# EAGLE board Redesign-8Ch-Mux-Breakout-PMODIA (EAGLE 9.6.2)
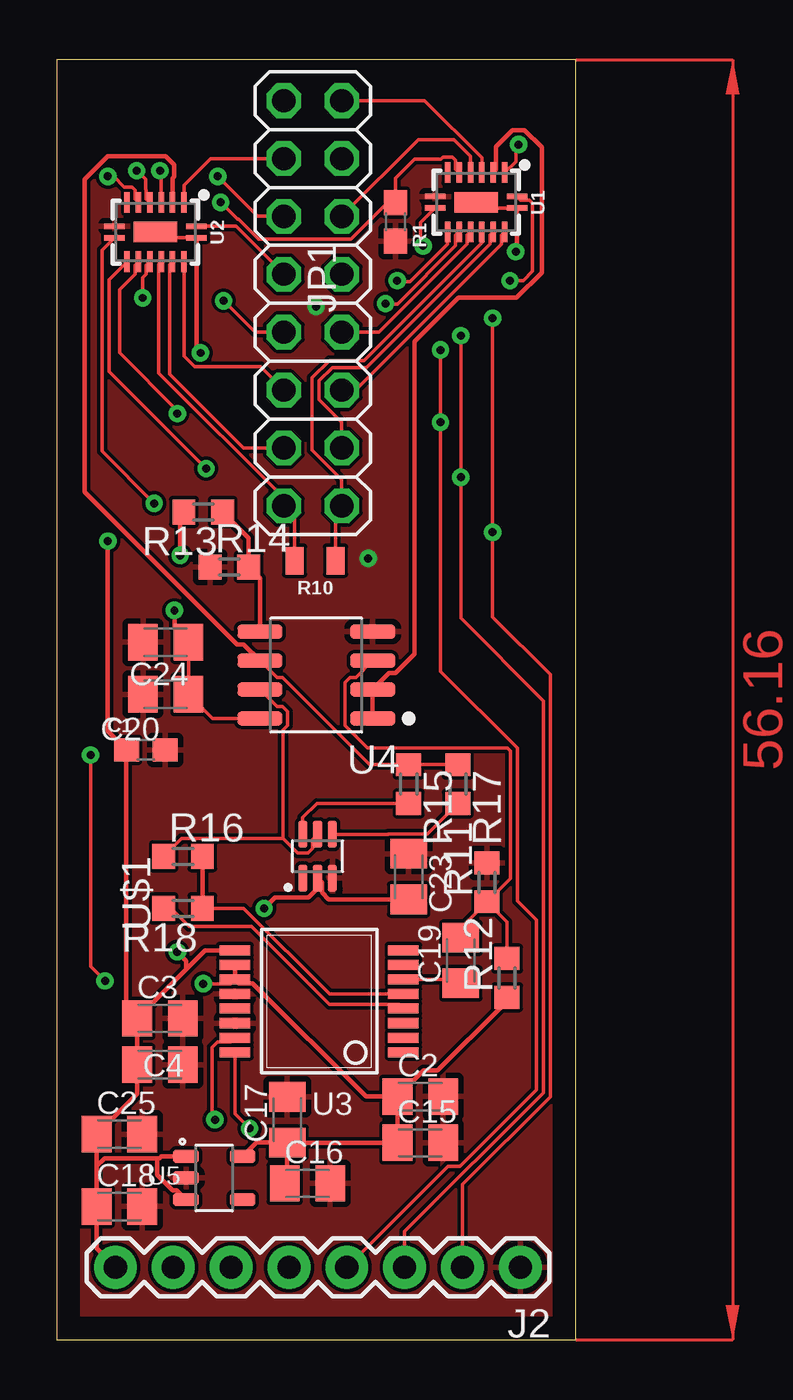
[diagram p0: board, top side]
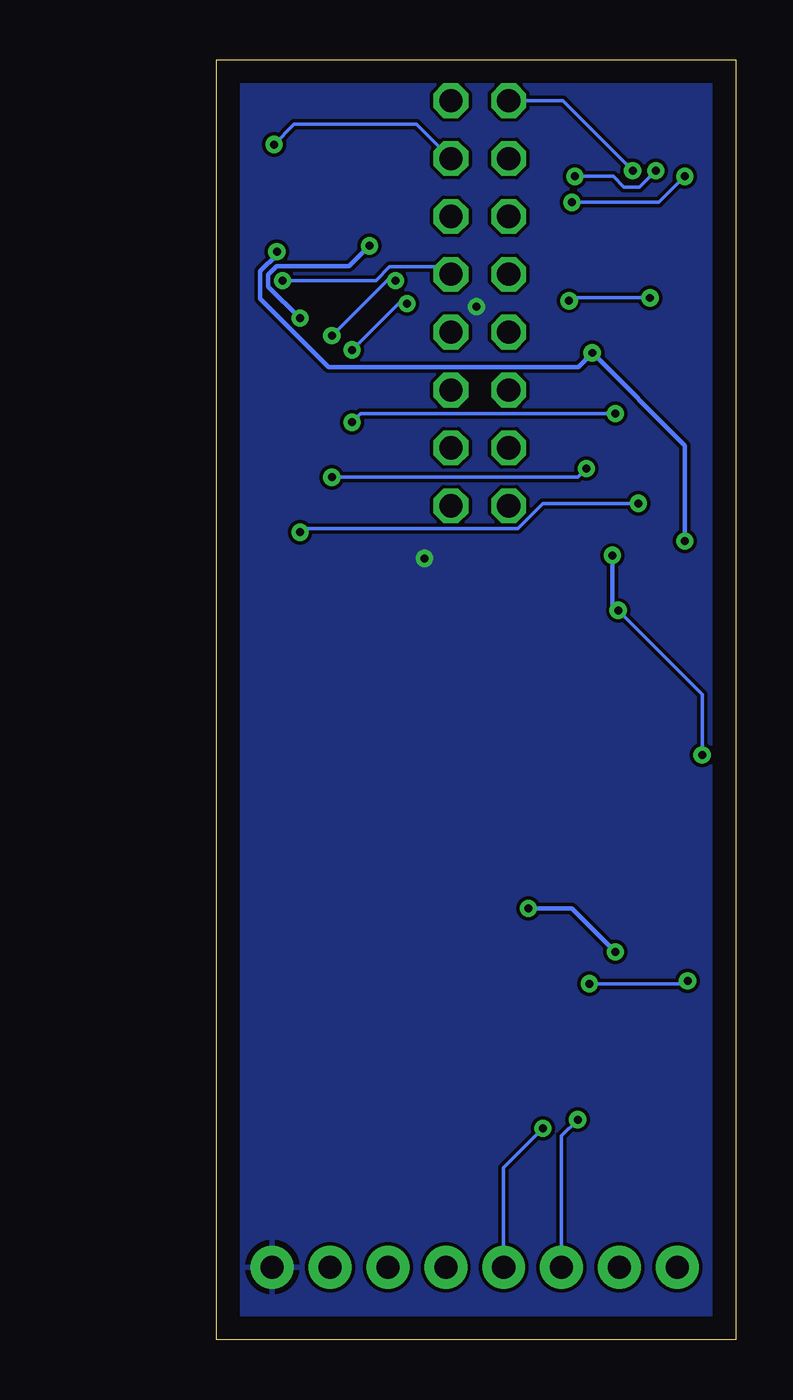
[diagram p1: board, bottom side, seen from below]

Size 22.79 x 56.16 mm. Coordinates in mm from the lower left corner, seen from the top.
Outline: 0,0 22.79,0 22.79,56.16 0,56.16 0,0
Copper layers (1*16): Top 0.035mm / dielectric 1.5mm / Bottom 0.035mm
Design rules "default": minimum track width 6mil, minimum drill 0.35mm, track to track 6mil, track to pad 6mil, pad to pad 6mil, via to via 6mil, smd to smd 6mil, copper to edge 40mil, drill to drill 6mil, minimum pad ring 10mil, minimum via ring 8mil, stop-mask expansion 4mil, vias tented up to drill 0mil, thermal gap 10mil

## Footprints (pad centres in the part's own frame; a part is rotated, then mirrored left to right if it is on the bottom)
0603 = smd 1.1 x 1: 1 -0.85,0; 2 0.85,0
C0805K = smd 1.3 x 1.6: 1 -1,0; 2 1,0
1X08_ROUND = drill 1.016 pad 1.88: 1 0,0; 2 2.54,0; 3 5.08,0; 4 7.62,0; 5 10.16,0; 6 12.7,0; 7 15.24,0; 8 17.78,0
2X08 = drill 1.016 octagon: 1 -8.89,-1.27; 2 -8.89,1.27; 3 -6.35,-1.27; 4 -6.35,1.27; 5 -3.81,-1.27; 6 -3.81,1.27; 7 -1.27,-1.27; 8 -1.27,1.27; 9 1.27,-1.27; 10 1.27,1.27; 11 3.81,-1.27; 12 3.81,1.27; 13 6.35,-1.27; 14 6.35,1.27; 15 8.89,-1.27; 16 8.89,1.27
0805 = smd 0.8 x 1.2: 1 -0.9,0; 2 0.9,0
R0603 = smd 1 x 1.1: 1 -0.85,0; 2 0.85,0
DHVQFN-16-2.5X3.5MM = smd 0.9 x 0.24: 1 -1.8,-0.25; 8 1.8,-0.25; 9 1.8,0.25; 16 -1.8,0.25 | smd 0.24 x 0.9: 2 -1.25,-1.3; 3 -0.75,-1.3; 4 -0.25,-1.3; 5 0.25,-1.3; 6 0.75,-1.3; 7 1.25,-1.3; 10 1.25,1.3; 11 0.75,1.3; 12 0.25,1.3; 13 -0.25,1.3; 14 -0.75,1.3; 15 -1.25,1.3 | smd 1.9 x 0.9: EP 0,0
SSOP16 = smd 0.44 x 1.34: 1 -2.24,-3.7; 2 -1.6,-3.7; 3 -0.96,-3.7; 4 -0.32,-3.7; 5 0.32,-3.7; 6 0.96,-3.7; 7 1.6,-3.7; 8 2.24,-3.7; 9 2.24,3.7; 10 1.6,3.7; 11 0.96,3.7; 12 0.32,3.7; 13 -0.32,3.7; 14 -0.96,3.7; 15 -1.6,3.7; 16 -2.24,3.7
SOIC-8 = smd 1.97 x 0.6: 1 -2.475,1.905; 2 -2.475,0.635; 3 -2.475,-0.635; 4 -2.475,-1.905; 5 2.475,-1.905; 6 2.475,-0.635; 7 2.475,0.635; 8 2.475,1.905
SOT95P280X100-5N = smd 1.14 x 0.59: 1 -1.245,0.95; 2 -1.245,0; 3 -1.245,-0.95; 4 1.245,-0.95; 5 1.245,0.95
SOT65P210X110-6N = smd 1.19 x 0.4: 1 -0.96,0.65; 2 -0.96,0; 3 -0.96,-0.65; 4 0.96,-0.65; 5 0.96,0; 6 0.96,0.65

## Placement (x,y rotation side)
C1  0.1uF  [0603]  3.91,25.88 0 top
C2  0.1uF  [C0805K]  15.95,10.67 0 top
C3  10uF  [C0805K]  4.52,14.1 0 top
C4  0.1uF  [C0805K]  4.52,12.06 0 top
C15  10uF  [C0805K]  15.95,8.64 0 top
C16  10uF  [C0805K]  11,6.86 0 top
C17  0.1uF  [C0805K]  10.11,9.65 90 top
C18  0.1uF  [C0805K]  2.74,5.84 0 top
C19  47nF  [C0805K]  17.73,16.64 90 top
C20  10uF  [C0805K]  4.78,28.32 180 top
C23  0.1uF  [C0805K]  15.44,20.32 270 top
C24  0.1uF  [C0805K]  4.78,30.61 180 top
C25  10uF  [C0805K]  2.74,9.02 0 top
J2  [1X08_ROUND]  20.35,3.17 180 top
JP1  [2X08]  11.23,45.49 90 top
R1  10k  [0603]  14.86,49.05 270 top
R10  300  [0805]  11.33,34.19 180 top
R11  49.9K  [R0603]  18.87,20.07 90 top
R12  49.9K  [R0603]  19.76,15.88 90 top
R13  49.9K  [R0603]  6.43,36.32 180 top
R14  49.9K  [R0603]  7.57,33.91 0 top
R15  20  [R0603]  15.44,24.38 270 top
R16  20K  [R0603]  5.54,21.21 0 top
R17  100K  [R0603]  17.6,24.38 270 top
R18  20K  [R0603]  5.54,18.92 180 top
U1  74HC4051BQ  [DHVQFN-16-2.5X3.5MM]  18.4,49.92 180 top
U2  74HC4051BQ  [DHVQFN-16-2.5X3.5MM]  4.33,48.61 180 top
U3  AD5933  [SSOP16]  11.51,14.85 90 top
U4  AD8606  [SOIC-8]  11.39,29.16 180 top
U5  ADP150  [SOT95P280X100-5N]  6.91,7.1 0 top
U$1  ADG849THROUHG_HOLE  [SOT65P210X110-6N]  11.44,21.22 90 top

## Library data of the parts
C1 = SparkFun-Capacitors; PROD_ID: CAP-00810
C2-C4 C15-C20 C23-C25 = rcl; SPICEPREFIX: C
J2 = SparkFun-Connectors; PROD_ID: CONN-08437
JP1 = pinhead
R1 = SparkFun-Resistors; PROD_ID: RES-00824
R10 = SparkFun-Resistors; PROD_ID: RES-11622
R11-R18 = rcl; SPICEPREFIX: R
U1 U2 = 8mux; PROD_ID: IC-13334
U3 = PMODIA
U4 = Updated PMODIA; AVAILABILITY: In Stock; CHECK_PRICES: https://www.snapeda.com/parts/AD8606ARZ/Analog+Devices/view-part/?ref=eda; DESCRIPTION: Precision, Low Noise, RRIO, CMOS Op Amp (Dual); MF: Analog Devices; MP: AD8606ARZ; PACKAGE: SOIC-8 Analog Devices; PRICE: None; PURCHASE-URL: https://www.snapeda.com/api/url_track_click_mouser/?unipart_id=43414&manufacturer=Analog Devices&part_name=AD8606ARZ&search_term=ad8606; SNAPEDA_LINK: https://www.snapeda.com/parts/AD8606ARZ/Analog+Devices/view-part/?ref=snap
U5 = Updated PMODIA; AVAILABILITY: In Stock; CHECK_PRICES: https://www.snapeda.com/parts/ADP150AUJZ-2.0-R7/Analog+Devices/view-part/?ref=eda; DESCRIPTION: Ultralow Noise, 150 mA CMOS Linear Regulator; MF: Analog Devices; MP: ADP150AUJZ-2.0-R7; PACKAGE: TSOT-5 Analog Devices; PRICE: None; PURCHASE-URL: https://www.snapeda.com/api/url_track_click_mouser/?unipart_id=1225884&manufacturer=Analog Devices&part_name=ADP150AUJZ-2.0-R7&search_term=adp150; SNAPEDA_LINK: https://www.snapeda.com/parts/ADP150AUJZ-2.0-R7/Analog+Devices/view-part/?ref=snap
U$1 = Updated_PMODIA_V2

## Nets
E: R1.1 U1.6 U2.6
GND: C1.2 C2.2 C3.2 C4.2 C15.2 C16.2 C17.2 C18.2 C20.2 C23.1 C24.2 C25.2 J2.1 R1.2 R11.2 R14.1 U1.8 U2.8 U3.12 U3.14 U4.4 U5.2 U$1.3
INBP: R13.1 R14.2 U4.5
N$1: C19.1 U3.6
N$3: C19.2 R11.1 R12.2 U4.3
N$5: R18.2 U3.4
N$6: R15.2 U$1.6
N$8: U3.13
N$9: R17.2 U$1.4
N$11: R16.1 U4.7 U$1.5
S0: J2.4 U1.11 U2.11
S1: J2.3 U1.10 U2.10
S2: J2.2 U1.9 U2.9
SCL: J2.5 U3.16
SDA: J2.6 U3.15
SEL: U$1.1
VCC: C1.1 C3.1 C4.1 C18.1 C23.2 C25.1 J2.8 U1.16 U1.EP U2.16 U2.EP U3.9 U5.1 U5.3 U$1.2
VCC3V0: C2.1 C15.1 C16.1 C17.1 C20.1 C24.1 R12.1 R13.2 U3.10 U3.11 U4.8 U5.5
VIN: R16.2 R18.1 U3.5
Y0: JP1.1 R10.1 U1.13
Y1: JP1.3 U1.14
Y2: JP1.5 U1.15
Y3: JP1.7 U1.12
Y4: JP1.9 U1.1
Y5: JP1.11 U1.5
Y6: JP1.13 U1.2
Y7: JP1.15 U1.4
Y20: JP1.2 R10.2 U2.13
Y21: JP1.4 U2.14
Y22: JP1.6 U2.15
Y23: JP1.8 U2.12
Y24: JP1.10 U2.1
Y25: JP1.12 U2.5
Y26: JP1.14 U2.2
Y27: JP1.16 U2.4
Z: U1.3 U4.1 U4.2
Z2: R15.1 R17.1 U2.3 U4.6

## Tracks (layer width: path | path; a pad name or v marks a point on that pad's centre or on a via)
E  (via drill 0.35)
  Top 0.152: U1.6 17.5,51.37 17.5,51.76 17.37,51.89 16.94,51.89 16.86,51.82 15.7,51.82 14.86,50.98 R1.1 14.51,49.9 12.91,48.31 8.84,48.31 7.98,49.16 7.93,49.16 v7.19,49.91 | v2.24,51.05 2.49,51.05 2.95,50.59 3.29,50.59 3.43,50.45 3.43,50.06 U2.6
  Bottom 0.152: v2.24,51.05 3.38,49.91 v7.19,49.91
GND  (via drill 0.35)
  other vias: 11.38,45.34 13.67,34.29
  pour Bottom: 0.2,0.13 0.2,56.26 22.81,56.26 23.32,55.75 23.32,0.76 22.68,0.13
  pour Top: 0.2,0.13 0.2,56.01 -0.05,56.26 23.44,56.26 23.44,0 0.46,0 0.33,0.13
INBP
  Top 0.203: U4.5 8.91,33.41 R14.2 8.42,35.18 R13.1
N$1
  Top 0.152: U3.6 17.56,15.81 C19.1
N$3
  Top 0.152: C19.2 17.73,18.07 R11.1 | U4.3 13.12,29.06 12.87,29.06 12.65,28.84 12.65,26.95 13.64,25.96 19.77,25.96 19.91,25.83 19.91,20.25 R11.1 | R11.1 19.76,18.33 R12.2
N$5
  Top 0.152: U3.4 15.02,14.72 11.98,14.72 8.55,18.14 5.79,18.14 5.01,18.92 R18.2
N$6
  Top 0.152: R15.2 11.42,23.53 10.79,22.91 U$1.6
N$9
  Top 0.152: U$1.4 14.53,22.18 14.55,22.2 16.27,22.2 R17.2
N$11
  Top 0.152: U$1.5 11.22,21.96 11.22,21.55 11.03,21.36 10.55,21.36 9.92,21.99 | 9.92,21.99 5.47,21.99 R16.1 | U4.7 9.66,27.79 9.91,27.79 10.13,27.57 10.13,26.95 9.92,26.75 9.92,21.99
S0  (via drill 0.35)
  Top 0.152: U1.11 17.5,48.47 17.5,48 14.95,45.45 14.44,45.45 v14.43,45.47 | U2.11 3.43,47.16 3.43,46.77 2.74,46.08 2.74,43.31 5.28,40.77 v5.28,40.64 | v16.84,43.43 v16.84,40.26 16.84,29.32 20.21,25.95 20.21,19.25 21.05,18.41 21.05,10.96 17.7,7.61 17.16,7.61 J2.4
  Bottom 0.152: v14.43,45.47 14.81,45.47 v16.84,43.43 | v5.28,40.64 16.46,40.64 v16.84,40.26
S1  (via drill 0.35)
  Top 0.152: U1.10 17.16,48.08 15.5,46.43 14.99,46.43 v14.94,46.48 | U2.10 2.29,46.52 2.29,42.49 v6.55,38.23 | J2.3 15.27,4.75 21.35,10.83 21.35,28.04 17.73,31.66 v17.73,37.85 v17.73,44.07
  Bottom 0.152: v14.94,46.48 15.32,46.48 v17.73,44.07 | v17.73,37.85 6.93,37.85 v6.55,38.23
S2  (via drill 0.35)
  Top 0.152: U1.9 15.95,49.01 15.95,48.13 v16.08,48.01 | U2.9 1.98,47.81 1.98,38.99 v4.27,36.7 | v19.13,44.83 v19.13,35.43 19.13,31.71 21.66,29.18 21.66,10.66 17.81,6.81 J2.2
  Bottom 0.152: v4.27,36.7 8.45,36.7 9.55,35.61 18.95,35.61 v19.13,35.43
  Bottom 0.203: v16.08,48.01 16.97,47.11 20.15,47.11 20.52,46.74 20.52,46.22 v19.13,44.83
SCL  (via drill 0.35)
  Top 0.152: U3.16 7.81,9.92 v8.46,9.27
  Bottom 0.152: v8.46,9.27 10.19,7.54 J2.5
SDA  (via drill 0.35)
  Top 0.152: U3.15 7.62,13.06 7.05,13.06 6.81,12.82 6.81,9.78 v6.93,9.65
  Bottom 0.152: v6.93,9.65 7.65,8.94 J2.6
VCC  (via drill 0.35)
  Top 0.152: U1.16 18.66,49.67 U1.EP | U2.16 4.58,48.36 U2.EP
  Top 0.203: J2.8 1.74,4 C18.1 1.74,7.62 | 1.74,7.62 C25.1 3.52,10.79 C4.1 C3.1 | U5.1 4.58,8.05 4.5,7.96 4.39,7.96 | 1.74,7.62 2.09,7.96 4.39,7.96 | U5.3 5.26,6.55 5.08,6.55 4.39,7.23 4.39,7.96 | C3.1 5.67,16.25 | 5.67,16.25 6.51,17.09 U3.9 | U$1.2 11.64,20.06 11.64,19.94 | 11.64,19.94 11.64,19.62 11.93,19.32 C23.2 | C3.1 3.04,14.57 3.04,25.87 C1.1 2.24,26.7 v2.24,35.05 | 11.64,19.94 11.57,19.94 11.04,19.41 9.58,19.41 v9.09,18.92 | v5.28,17.02 5.67,16.63 5.67,16.25 | U2.16 6.13,43.48 v6.3,43.31 | U1.16 20.21,47.81 v20.14,47.75
  Bottom 0.203: v5.28,17.02 7.19,18.92 v9.09,18.92 | v2.24,35.05 2.24,39.24 v6.3,43.31 6.91,42.69 17.88,42.69 20.88,45.69 20.88,46.89 20.14,47.62 v20.14,47.75
VCC3V0  (via drill 0.35)
  Top 0.152: C24.1 C20.1 6.84,27.26 U4.8 | v1.47,25.65 1.47,16.38 v2.11,15.75 | U3.11 7.62,15.62 v6.43,15.62
  Top 0.203: U5.5 8.76,8.65 C17.1 | C16.1 10.11,6.97 C17.1 | U3.10 U3.11 7.98,15.64 8.59,15.64 13.56,10.67 14.94,10.67 | 14.94,10.67 C2.1 16.09,11.81 16.71,11.81 19.51,14.6 19.51,15.02 R12.1 | 14.94,10.67 14.95,10.65 C15.1 10.13,8.64 C17.1 | R13.2 5.41,36.16 v5.41,34.42 | C24.1 5.16,31.23 v5.16,32
  Bottom 0.152: v5.16,32 1.47,28.32 v1.47,25.65 | v6.43,15.62 2.24,15.62 v2.11,15.75
  Bottom 0.203: v5.41,34.42 5.41,32.26 v5.16,32
VIN
  Top 0.152: R18.1 8.2,18.92 11.96,15.17 U3.5
  Top 0.203: R18.1 R16.2
Y0
  Top 0.152: JP1.1 12.5,36.7 | 12.5,36.7 12.5,37.73 11.21,39.03 11.21,42.21 11.97,42.97 13.47,42.97 18.66,48.15 U1.13 | R10.1 12.23,36.44 12.5,36.7
Y1
  Top 0.152: U1.14 19,48.47 19,48.07 13.6,42.67 12.09,42.67 11.51,42.09 11.51,41.27 12.5,40.27 JP1.3
Y2
  Top 0.152: U1.15 19.5,48.47 19.5,48.07 13.11,41.68 JP1.5
Y3
  Top 0.152: U1.12 18,48.47 18,48.07 14.15,44.22 JP1.7
Y4  (via drill 0.35)
  Top 0.152: U1.1 20.36,50.02 20.75,50.02 20.88,49.88 20.88,46.89 20.47,46.48 v19.89,46.48
  Bottom 0.152: v19.89,46.48 15.79,46.48 15.19,47.09 12.83,47.09 JP1.9
Y5
  Top 0.152: JP1.11 15.86,52.66 17.43,52.66 18.16,51.93 U1.5
Y6  (via drill 0.35)
  Top 0.152: U1.2 20.14,51.7 20.14,52.32 v20.27,52.45
  Bottom 0.152: v20.27,52.45 19.38,53.34 15.7,53.34 15.57,53.34 14.01,53.34 JP1.13
Y7
  Top 0.152: U1.4 18.66,51.86 16.14,54.38 JP1.15
Y20
  Top 0.152: R10.2 10.43,36.12 JP1.2 9.96,36.93 4.48,42.41 4.48,47.21 U2.13
Y21
  Top 0.152: JP1.4 8.18,39.14 4.95,42.37 4.95,47.18 U2.14
Y22
  Top 0.152: U2.15 5.58,43.17 6.05,42.7 8.94,42.7 JP1.6
Y23  (via drill 0.35)
  Top 0.152: JP1.8 8.69,44.22 v7.32,45.59 | U2.12 3.93,47.16 3.93,46.77 3.76,46.6 v3.76,45.72
  Bottom 0.152: v7.32,45.59 7.19,45.72 v3.76,45.72
Y24
  Top 0.152: JP1.10 7.86,48.86 U2.1
Y25  (via drill 0.35)
  Top 0.152: JP1.12 8.82,49.3 v7.06,51.05 | v3.51,51.31 3.89,50.93 3.89,50.5 3.93,50.45 3.93,50.06 U2.5
  Bottom 0.152: v7.06,51.05 5.38,51.05 4.9,50.57 4.24,50.57 v3.51,51.31
Y26
  Top 0.152: JP1.14 6.74,51.84 5.58,50.67 U2.2
Y27  (via drill 0.35)
  Top 0.152: U2.4 4.58,51.25 v4.52,51.31
  Bottom 0.152: JP1.16 7.59,54.38 v4.52,51.31
Z
  Top 0.203: U1.3 19.28,51.34 19.28,52.36 20.01,53.08 20.53,53.08 21.29,52.33 21.29,46.83 20.18,45.72 17.62,45.72 15.71,43.81 15.71,30.08 14.87,29.24 14.58,29.24 U4.2 U4.1
Z2
  Top 0.152: U4.6 9.66,29.06 9.91,29.06 13.73,25.23 R15.1 R17.1
  Top 0.203: U4.6 8.2,30.52 7.91,30.52 1.22,37.2 1.22,50.94 2.23,51.94 4.78,51.94 5.15,51.57 5.15,51.05 5.08,50.97 U2.3
(copper drawn outside any net)
  shapes: Top area x1